# Altium PCB PCB1.PcbDoc
Units mil, origin at the board's own origin, x right, y up, seen from the top; angles counter-clockwise.
Board outline 1055 x 695 mil, 2 copper layers (Top Layer, Bottom Layer); 5 components, 7 nets, 20 pads, 1 vias.
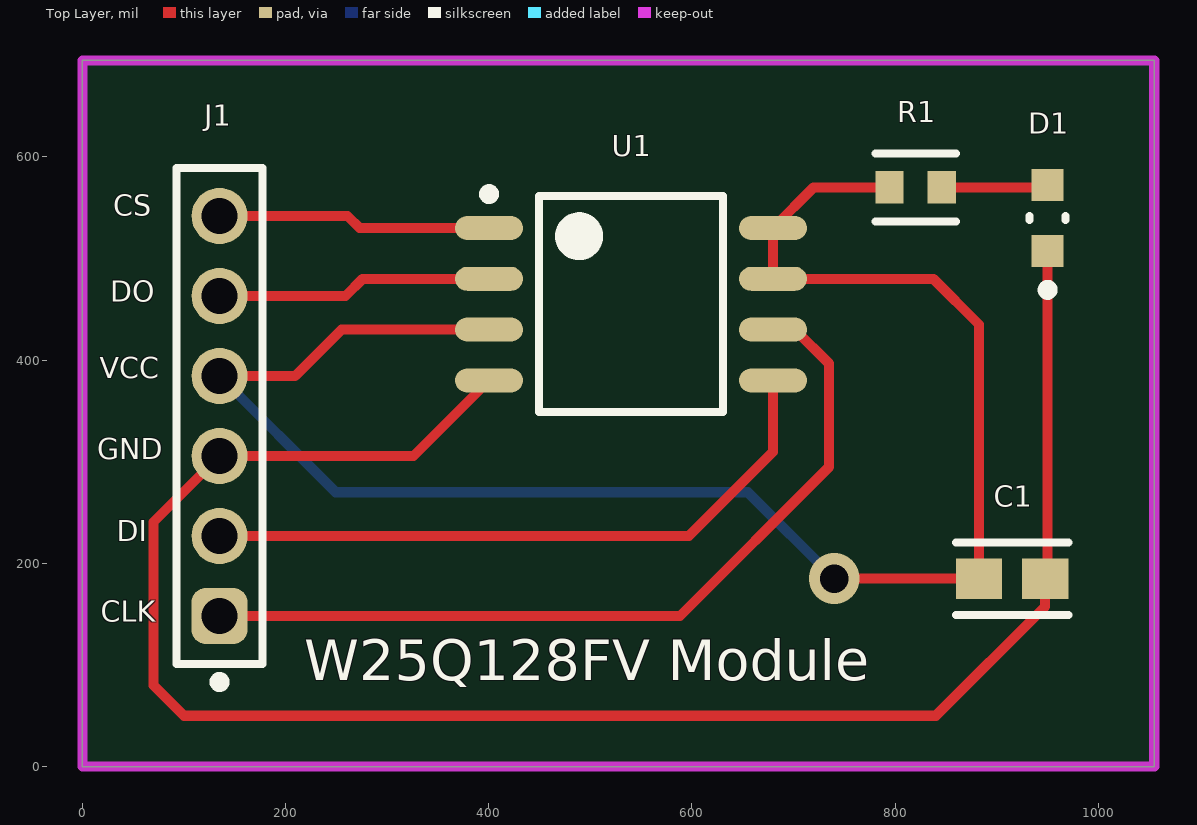
[diagram p0: Top Layer view]
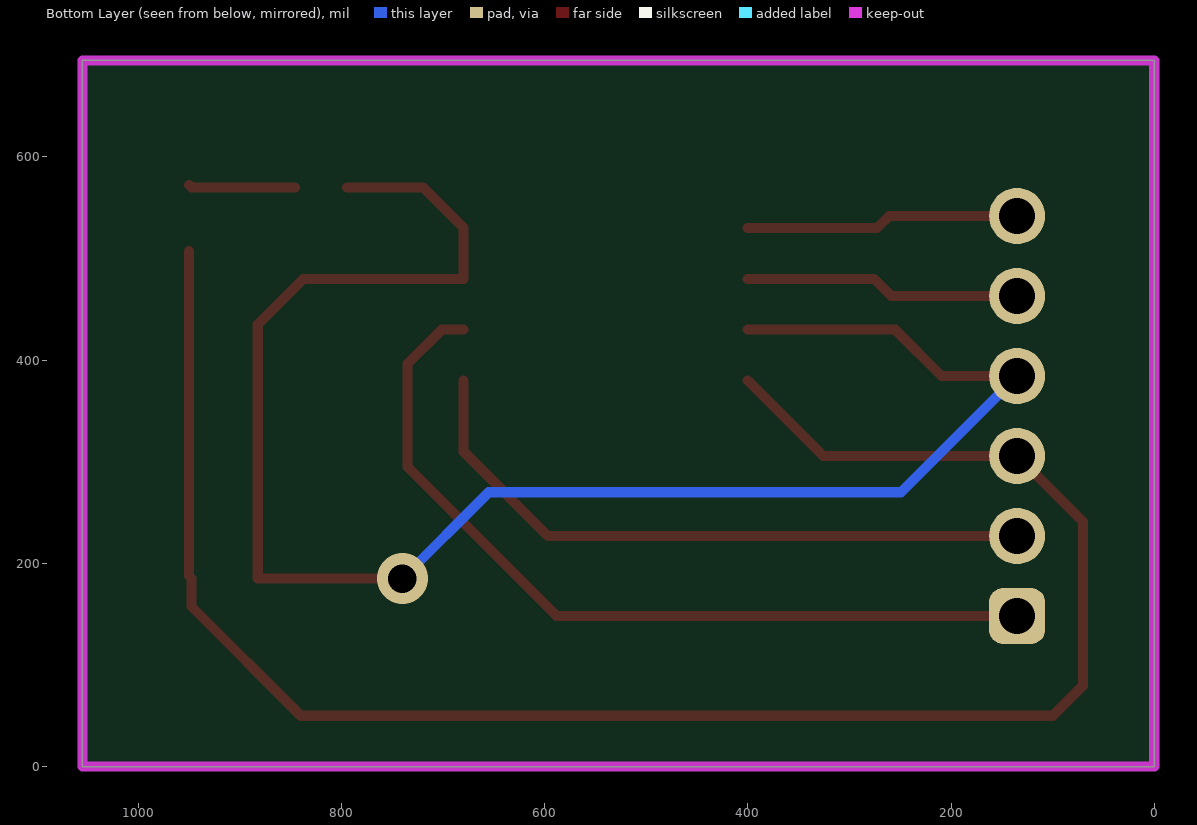
[diagram p1: Bottom Layer view, seen from below]
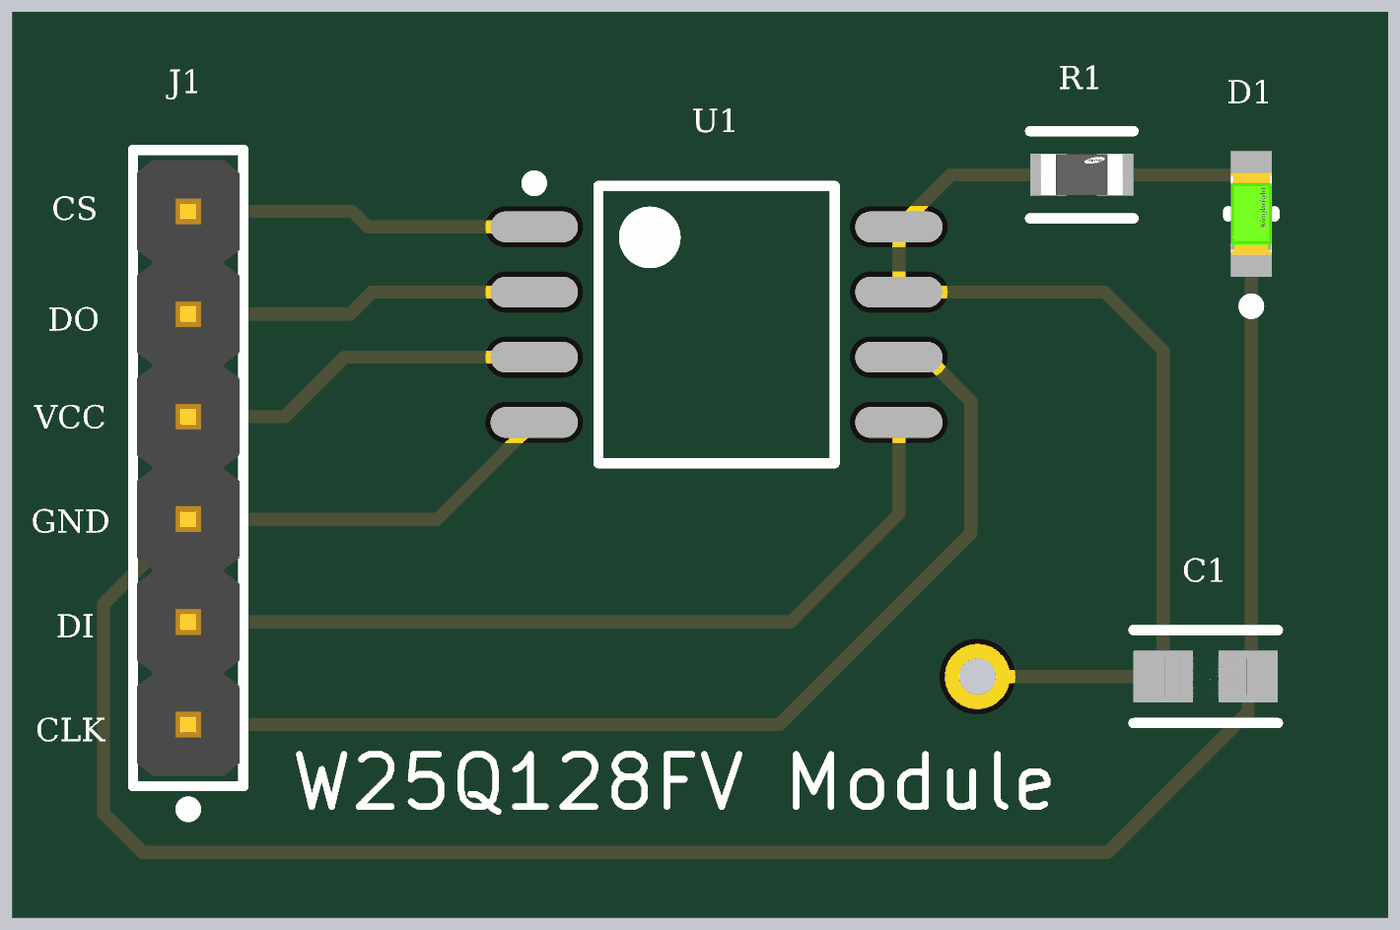
[diagram p2: 3D render of the assembled board from above, using the file's embedded part models]

## Layer stack, top to bottom
Top Solder: solder mask 0.4, Solder Resist, Dk 3.5
Top Layer: signal copper 1.4
Dielectric 1: dielectric 12.6, FR-4, Dk 4.8
Bottom Layer: signal copper 1.4
Bottom Solder: solder mask 0.4, Solder Resist, Dk 3.5

## Board outline
0,0 1055,0 1055,695 0,695

## Design rules (kind name [scope] priority, off if disabled: settings)
Clearance [All] p1: gap=10 ignorepadtopadclearanceinfootprint=FALSE
PolygonConnect [All] p1: connectstyle=Relief reliefconductorwidth=10 reliefentries=4 polygonreliefangle="90 Angle" airgapwidth=10
RoutingVias [All] p1: holewidth=28 width=50 viastyle="Through Hole" minholewidth=28 minwidth=50 maxholewidth=28 maxwidth=50
SolderMaskExpansion [All] p1: expansion=4 istentingtop=FALSE
SupplyNets "Schematic Supply Nets_1" [InNet('GND')] p1: voltage=0.000
SupplyNets "Schematic Supply Nets" [InNet('VCC')] p2: voltage=0.000
Width [All] p1: maxlimit=10 minlimit=10 preferedwidth=10
30 further rules are at their usual default settings.

## Components (designator, comment, footprint, x,y, rotation, side; value= is the part's Value field where it differs from the comment)
C1 "CL10A105KP8NNNC" FP-CL10-IPC_A 915,185 r0 top
D1 "APT1608ZGCK" FP-APT1608ZGCK-MFG 950,540 r90 top
J1 "62000611121" 62000611121 135,345 r90 top
R1 "RC1608J102CS" FP-RC1608-IPC_C 820,570 r0 top
U1 "W25Q64FVSSIG" WINB-SOIC-8_N 540,455 r0 top

## Footprints (in the part's own frame and the unit in brackets; to place one, negate y for a bottom-side part, rotate by r counter-clockwise, add the part's x,y. Pads: shape width x height; smd on the part's side, far side on the other; paste and mask are expansions set on the pad)
62000611121 [mm] "Pin Header, pitch 2.00 mm, THT, Vertical, single row, 6p"
  rrect50% 1.4x1.4 hole 0.9: 1(-5,0)
  round 1.4 hole 0.9: 2(-3,0) 3(-1,0) 4(1,0) 5(3,0) 6(5,0)
  silkscreen extent -6.77,-1.07 6.2,1.07, body extent -6,-1 6,1, height 6.05
FP-APT1608ZGCK-MFG [mm]
  rect 0.8x0.8 smd paste+0 mask+0: 1(-0.825,0) 2(0.825,0)
  silkscreen extent -1.92,-0.45 0.05,0.45, body extent -1.33,-0.55 1.33,0.55, height 0.25
FP-CL10-IPC_A [mil]
  rect 45.6x39.85 smd paste+0 mask+0: 1(-32.56,0) 2(32.56,0)
  silkscreen extent -55,-36 55,36, body extent -75,-40 75,40, height 10
FP-RC1608-IPC_C [mil]
  rect 27.94x31.97 smd paste+0 mask+0: 1(-25.64,0) 2(25.64,0)
  silkscreen extent -40,-33 40,33, body extent -44,-22 44,22, height 10
WINB-SOIC-8_N [mm] "SOIC, 8-Leads, Body 5.4x5.4mm, Pitch 1.27mm, IPC Medium Density"
  oval 1.7x0.6 smd: 1(-3.55,1.905) 2(-3.55,0.635) 3(-3.55,-0.635) 4(-3.55,-1.905) 5(3.55,-1.905) 6(3.55,-0.635) 7(3.55,0.635) 8(3.55,1.905)
  silkscreen extent -3.67,-2.7 2.3,2.88, body extent -2.7,-2.7 2.7,2.7, height 2.16

## Part data
C1: library part CMP-13271-003399-1, "Cap Ceramic 1uF 10V X5R ±10% Pad SMD 0603 +85°C T/R", Capacitance=1uF, Case Code (Imperial)=0603, Case Code (Metric)=1608, Dielectric=X5R, Max Operating Temperature=85°C, Min Operating Temperature=-55°C, Package Quantity=1, Tolerance=10%, Voltage=10V, Case/Package=0603, Contact Plating=Tin, Depth=0.8mm, Height=0.8mm, Length=1.6mm, Mount="Surface Mount", Packaging="Tape and Reel", Radiation Hardening=No, Thickness=0.035inch, Voltage Rating=10V, Width=0.031inch
D1: library part CMP-44529-000024-1, "LED GREEN CLEAR CHIP SMD", Case Code (Imperial)=0603, Case Code (Metric)=1608, Color=Green, Forward Current=20mA, Forward Voltage=3.3V, Lens Color=Colorless, Max Operating Temperature=85°C, Min Operating Temperature=-40°C, Package Quantity=1, Case/Package=0603, Dominant Wavelength=525nm, Height=0.75mm, Illumination Color=Green, Lead Free="Lead Free", Length=1.6mm, Lens Transparency=Clear, Luminous Intensity=350mcd, Mount="Surface Mount", Packaging="Tape and Reel", Test Current=20mA, Viewing Angle=120°, Width=0.8mm
J1: library part CMP-1502-00960-3, Contact Resistance=20mΩ, Current Rating=2A, Operating Supply Voltage=200V, Gender=Male, Lead Pitch=2mm, NexarPartId=61924782, Number of Pins=6, Orientation=Vertical, RoHS=Non-Compliant
R1: library part CMP-13261-002301-1, "Res Thick Film 0603 1kΩ 5% 0.1W ±100ppm/°C Molded SMD T/R", Case Code (Imperial)=0603, Case Code (Metric)=1608, Max Operating Temperature=155°C, Max Power Dissipation=100mW, Min Operating Temperature=-55°C, Resistance=1kR, Temperature Coefficient=100ppm/°C, Tolerance=5%, Voltage Rating (DC)=50V, Case/Package=0603, Composition="Thick Film", Contact Plating=Tin, Depth=0.8mm, Features="Moisture Resistant", Height=0.022inch, Lead Free="Lead Free", Length=1.6mm, Military Standard=Not, Mount="Surface Mount", Number of Terminations=2, Packaging="Tape and Reel", Power Rating=100mW, Radiation Hardening=No, Width=0.031inch
U1: library part CMP-2000-05007-1, "3V 64M-Bit Serial Flash Memory with Dual/Quad SPI & QPI, 2.7 to 3.6 V, -40 to 85 degC, 8-Pin SOIC, RoHS, Tape and Reel", Manufacturer=Winbond, Operating Supply Voltage (Max)=3.6V, Operating Supply Voltage (Min)=2.7V, Operating Supply Voltage (Typ)=3/3.3V, Operating Temp Range=-40Cto85C, Operating Temperature (Max)=85C, Operating Temperature (Min)=-40C, Operating Temperature Classification=Industrial, Package Description="8-Pin Small Outline Integrated Circuit, Body 5.28 x 5.28 mm, Pitch 1.27 mm", Package Reference=SS-8, Package Type=SOIC, Program/Erase Volt (Typ)=2.7to3.6V, Supply Current=40mA, Access Time (Max)=8.5ns, Address Bus=1b, Boot Type=Bottom/Top, Cell Type=NOR, Datasheet URL=https://datasheet.ciiva.com/15126/getdatasheetpartid-552937-15126648.pdf, Datasheet Version="Rev. D, 12/2011", Density=67108864Bit, Interface Type=Serial(SPI), Manufacturer URL=http://www.winbond.com/hq/index.html?__locale=en, Mounting=SurfaceMount, Number of Words=8M, Pin Count=8, Programmable=Yes, Rad Hardened=No, Sync/Async=Synchronous, Word Size=8b

## Via types
v1: diameter 50, hole 28, Top Layer to Bottom Layer, 1 vias

## Nets (pads, with @x,y where several pads share a name; then routed paths per layer and width w, separated by ;. In a path a pad name is that pad's centre, name@x,y a point inside that pad or via, vN(x,y) a via of type N, cw(c..) or ccw(c..) an arc to the next point about the centre after c; other vN are vias at no path point)
CLK: J1.1 U1.6 | length 831.4
  Top Layer w10: J1.1 588.15,148.15 735,295 735,396.42 701.42,430 U1.6
CS: J1.6 U1.1 | length 270.1
  Top Layer w10: J1.6 261,541.85 272.85,530 U1.1
DI: J1.2 U1.5 | length 649.3
  Top Layer w10: J1.2 596.89,226.89 679.76,309.76 U1.5
DO: J1.5 U1.2 | length 272.2
  Top Layer w10: J1.5 259,463.11 275.89,480 U1.2
GND: C1.2 D1.1 J1.3 U1.4 | length 1834.1
  Top Layer w10: U1.4 325.87,305.63 J1.3 70,240.63 70,80 100,50 840,50 947.56,157.56 C1.2 950,187.44 D1.1
NetD1_2: D1.2 R1.2 | length 105.4
  Top Layer w10: R1.2 947.52,570 D1.2
VCC: C1.1 J1.4 R1.1 U1.3 U1.7 U1.8 | length 1766.6
  Top Layer w10: J1.4 209.37,384.37 255,430 U1.3 ; v1(740,185) C1.1 882.44,435 837.44,480 U1.7 U1.8 719.76,570 R1.1
  Bottom Layer w10: J1.4 249.37,270 655,270 v1(740,185)

## Keep-outs
Keep-Out Layer:
  the board outline again, w10

## Silkscreen, mask and mechanical layers (free items; w line width, h text height)
Top Overlay:
  text "CS" at 30.14,535.42 h35
  text "DO" at 27.29,450.42 h35
  text "VCC" at 16.9,375.42 h35
  text "GND" at 14.51,295.42 h35
  text "DI" at 33.67,215 h35
  text "CLK" at 17.91,135.42 h35
  text "W25Q128FV Module" at 218.43,85 h40